# Altium PCB bottle.PcbDoc (part 2 of 3)
Units mil, origin at the board's own origin, x right, y up, seen from the top; angles counter-clockwise.
Board outline 2167.23 x 704.79 mil, 4 copper layers (Top Layer, GND, PWR, Bottom Layer), stack 23.756 mil thick; 195 components, 172 nets, 770 pads, 122 vias.
Unrouted connection lines stored in the file: 308.
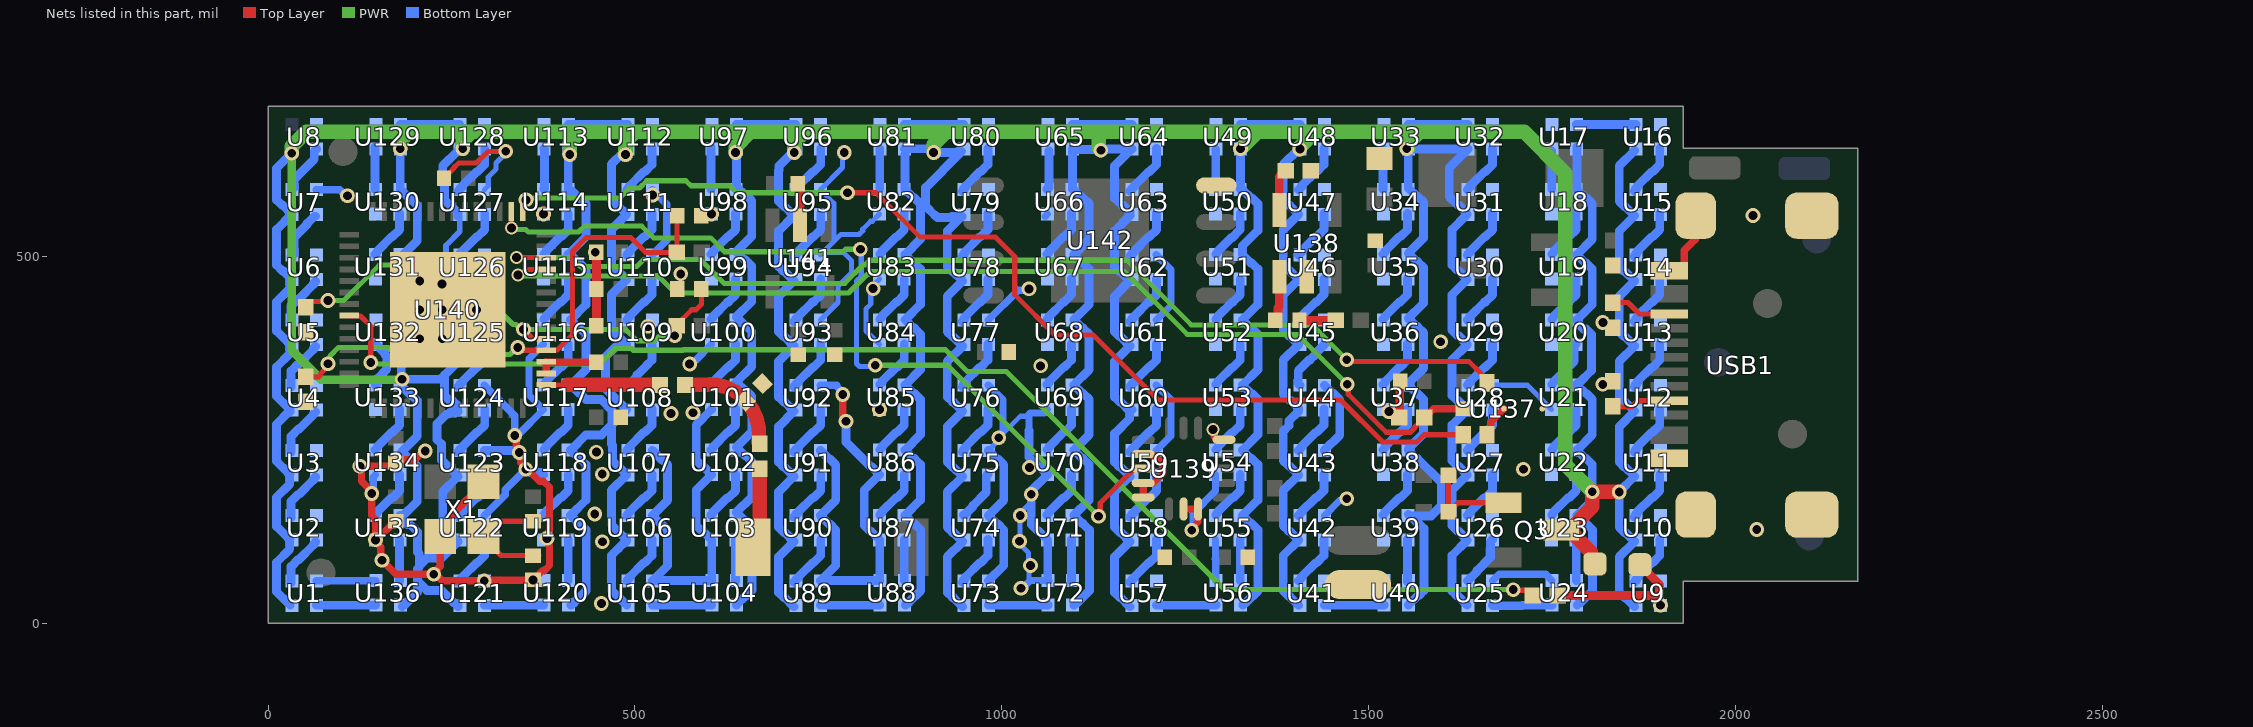
[diagram p4: the nets of this part, all layers, seen from the top]

## Via types
v1: diameter 20, hole 12, Top Layer to Bottom Layer, tented both sides, 96 vias
v2: diameter 18, hole 12, Top Layer to Bottom Layer, tented both sides, 13 vias
v3: diameter 24, hole 12, Top Layer to Bottom Layer, tented both sides, 13 vias

## Nets (pads, with @x,y where several pads share a name; then routed paths per layer and width w, separated by ;. In a path a pad name is that pad's centre, name@x,y a point inside that pad or via, vN(x,y) a via of type N, cw(c..) or ccw(c..) an arc to the next point about the centre after c; other vN are vias at no path point) (continued)
+5V_2812: pad.4@1808.82,81.04 Q3.3 U1.2 U2.2 U3.2 U4.2 U5.2 U6.2 U7.2 U8.2 U9.2 U10.2 U11.2 U12.2 U13.2 U14.2 U15.2 U16.2 U17.2 U18.2 U19.2 U20.2 U21.2 U22.2 U23.2 U24.2 U25.2 U26.2 U27.2 U28.2 U29.2 U30.2 U31.2 U32.2 U33.2 U34.2 U35.2 U36.2 U37.2 U38.2 U39.2 U40.2 U41.2 U42.2 U43.2 U44.2 U45.2 U46.2 U47.2 U48.2 U49.2 U50.2 U51.2 U52.2 U53.2 U54.2 U55.2 U56.2 U57.2 U58.2 U59.2 U60.2 U61.2 U62.2 U63.2 U64.2 U65.2 U66.2 U67.2 U68.2 U69.2 U70.2 U71.2 U72.2 U73.2 U74.2 U75.2 U76.2 U77.2 U78.2 U79.2 U80.2 U81.2 U82.2 U83.2 U84.2 U85.2 U86.2 U87.2 U88.2 U89.2 U90.2 U91.2 U92.2 U93.2 U94.2 U95.2 U96.2 U97.2 U98.2 U99.2 U100.2 U101.2 U102.2 U103.2 U104.2 U105.2 U106.2 U107.2 U108.2 U109.2 U110.2 U111.2 U112.2 U113.2 U114.2 U115.2 U116.2 U117.2 U118.2 U119.2 U120.2 U121.2 U122.2 U123.2 U124.2 U125.2 U126.2 U127.2 U128.2 U129.2 U130.2 U131.2 U132.2 U133.2 U134.2 U135.2 U136.2 | length 15956.2
  Top Layer w20: Q3.3@1762.58,127 Q3.3@1773.4,127 ; pad.4@1808.82,81.04 1803.07,86.79 1803.07,97.33 Q3.3@1773.4,127 ; v1(1841.88,179) 1841.49,179.4 v1(1805.2,179.4) 1805.2,158.79 Q3.3@1773.4,127
  PWR w12: v1(32.2,641) 32.2,372.25 72.46,332 181.89,332 v1(182.58,332.69)
  PWR w20: v1(32.2,641) 32.2,650.28 51.92,670 192.2,670 ; v1(180.13,646.93) 180.13,657.93 192.2,670 ; v1(265.2,646.98) 265.2,658 277.2,670 ; v1(411.2,639) 411.2,655.44 425.76,670 ; v1(487.2,639) 487.2,657 500.2,670 ; v1(637.2,642) 637.2,650 657.2,670 ; v1(717.2,642) 717.2,656 731.2,670 ; v1(907.2,642) 907.2,653 924.2,670 ; v1(1135.2,645) 1132.2,648 1132.2,670 ; v1(1325.42,646.93) 1326.13,646.93 1349.2,670 ; v1(1406.49,646.54) 1406.49,649.28 1427.2,670 ; v1(1552.24,647.02) 1554.48,649.26 1554.48,654.78 1569.7,670 ; v1(1805.2,179.4) 1768.41,216.19 1768.41,613.8 1712.2,670 1569.7,670 ; 192.2,670 277.2,670 ; 277.2,670 425.76,670 ; 425.76,670 500.2,670 ; 500.2,670 657.2,670 ; 657.2,670 731.2,670 ; 731.2,670 924.2,670 ; 924.2,670 1132.2,670 ; 1132.2,670 1349.2,670 ; 1349.2,670 1427.2,670 ; 1427.2,670 1569.7,670
  Bottom Layer w7.87: U126.2@261.2,468.84 256.28,473.76 256.28,475.46 242.4,489.33 242.4,515.28 261.2,534.08 261.2,552.77 258.74,555.23 U127.2@261.2,557.69
  Bottom Layer w12: U8.2@29.44,638.54 11.35,620.46 11.35,577.32 18.38,570.29 19.6,570.29 U7.2@32.21,557.69 11.35,536.83 11.35,488.48 19.64,480.18 20.86,480.18 30.07,470.98 29.35,470.26 29.35,456.37 11.35,438.37 11.35,398.71 27.21,382.85 29.35,382.85 30.07,382.13 29.35,381.41 29.35,367.52 11.35,349.52 11.35,309.87 27.21,294.01 29.35,294.01 30.07,293.28 30.07,289.01 29.35,288.29 28.06,288.29 11.35,271.58 11.35,221.02 27.21,205.16 29.35,205.16 30.07,204.44 29.35,203.72 29.35,189.83 11.35,171.83 11.35,132.17 27.21,116.31 29.35,116.31 30.07,115.59 29.35,114.87 29.35,100.98 11.35,82.98 11.35,43.33 27.21,27.46 29.35,27.46 30.07,26.74 U1.2@30.07,24.61 ; U135.2@179.74,147.31 182.6,144.45 182.6,141.73 189.63,134.7 193.57,134.7 203.59,124.68 203.59,97.31 205.97,94.93 205.97,78.37 ; U132.2@180.13,380.39 181.36,379.17 181.36,333.91 v1(182.58,332.69) 234.59,332.69 240.34,338.44 ; U130.2@180.13,591.94 v1(180.13,646.93) ; U135.2@182.34,145.31 203.2,166.17 203.2,214.52 194.9,222.82 193.68,222.82 182.34,234.16 203.2,255.02 203.2,303.37 194.9,311.66 193.68,311.66 U133.2@182.34,323.01 ; U131.2@182.34,500.7 203.2,521.56 203.2,569.91 194.91,578.2 193.68,578.2 U130.2@182.34,589.55 ; U136.2@182.73,23 185.59,25.86 186.81,25.86 203.59,42.64 203.59,57.89 ; U121.2@258.74,22.61 258.74,27.06 258.34,27.46 253.88,27.46 236.35,45 216.48,45 203.59,57.89 ; U125.2@258.74,371.14 258.74,356.84 240.34,338.44 ; U127.2@258.74,555.23 258.74,560.15 249.86,569.03 248.63,569.03 240.34,577.32 240.34,597.43 237.88,599.89 237.88,623.68 U128.2@258.74,644.54 ; U115.2@408.8,502.7 433.2,527.1 433.2,571.91 424.91,580.2 423.68,580.2 415.2,588.69 411.66,588.69 409.19,591.15 U113.2@409.19,639 ; U115.2@412.34,502.7 423.68,491.36 424.91,491.36 433.2,483.06 433.2,434.71 412.34,413.85 423.68,402.51 424.9,402.51 433.2,394.22 433.2,345.86 412.34,325.01 423.68,313.66 424.9,313.66 433.2,305.37 453.67,305.37 468.28,290.76 468.28,270.88 454.22,256.82 433,256.82 412.34,236.16 423.68,224.82 424.9,224.82 433.2,216.52 433.2,168.17 412.34,147.31 423.68,135.97 424.91,135.97 433.59,127.28 433.59,44.64 416.81,27.86 415.59,27.86 U120.2@412.73,25 ; U112.2@484.2,642 467.88,625.68 467.88,577.32 474.91,570.29 476.14,570.29 488.74,557.69 467.88,536.83 467.88,488.48 474.91,481.45 476.14,481.45 488.74,468.84 467.88,447.98 467.88,399.63 474.91,392.6 476.14,392.6 488.74,380 488.74,378.48 487.4,377.14 473.71,377.14 459.65,363.08 459.65,320.53 486.18,294.01 487.4,294.01 488.74,292.66 488.74,291.15 467.88,270.29 467.88,244.43 469.4,242.92 469.4,221.64 485.88,205.16 487.4,205.16 488.74,203.82 488.74,202.3 467.88,181.44 467.88,134.31 485.88,116.31 487.4,116.31 488.74,114.97 488.74,111.94 487.4,110.59 485.88,110.59 477.59,102.3 477.59,102.22 467.88,92.51 467.88,45.46 485.88,27.46 487.4,27.46 488.74,26.12 U105.2@488.74,24.61 ; U104.2@638.25,25 650.86,37.61 652.08,37.61 659.59,45.12 659.59,131.28 650.91,139.97 649.68,139.97 638.34,151.31 659.2,172.17 659.2,220.52 650.9,228.82 649.68,228.82 638.34,240.16 659.2,261.02 659.2,309.37 650.9,317.66 649.68,317.66 638.34,329.01 659.2,349.86 659.2,398.22 650.9,406.51 649.68,406.51 638.34,417.85 659.2,438.71 659.2,487.06 650.91,495.36 649.68,495.36 638.34,506.7 659.2,527.56 659.2,575.91 650.91,584.2 649.68,584.2 638.34,595.55 U97.2@638.34,644.07 ; U96.2@716.46,643.68 696.2,623.42 696.2,617.99 695.88,617.68 695.88,575.32 702.91,568.29 704.14,568.29 716.74,555.69 695.88,534.83 695.88,486.48 702.91,479.45 704.14,479.45 716.74,466.84 695.88,445.98 695.88,397.63 702.91,390.6 704.14,390.6 716.74,378 695.88,357.14 695.88,308.78 702.91,301.75 704.14,301.75 716.74,289.15 695.88,268.29 695.88,219.94 702.91,212.91 704.14,212.91 716.74,200.3 695.88,179.44 695.88,131.09 702.91,124.06 704.13,124.06 716.74,111.45 695.88,90.59 695.88,42.24 702.91,35.21 704.13,35.21 U89.2@716.74,22.61 ; U81.2@868.34,639.12 868.34,591.55 879.68,580.2 880.91,580.2 889.2,571.91 889.2,523.56 868.34,502.7 879.68,491.36 880.91,491.36 889.2,483.06 889.2,434.71 868.34,413.85 879.68,402.51 880.9,402.51 889.2,394.22 889.2,345.86 868.34,325.01 879.68,313.66 880.9,313.66 889.2,305.37 889.2,257.02 868.34,236.16 879.68,224.82 880.9,224.82 889.2,216.52 889.2,168.17 868.34,147.31 879.68,135.97 880.91,135.97 889.59,127.28 889.59,44.64 872.81,27.86 871.59,27.86 U88.2@868.73,25 ; U80.2@943.03,640.82 896.2,594 896.2,568.89 909.09,556 909.56,556 912.22,553.35 930.44,553.35 931.93,554.83 945.88,554.83 925.88,534.83 925.88,486.48 932.91,479.45 934.14,479.45 946.74,466.84 925.88,445.98 925.88,397.63 932.91,390.6 934.14,390.6 946.74,378 925.88,357.14 925.88,308.78 932.91,301.75 934.14,301.75 946.74,289.15 925.88,268.29 925.88,219.94 932.91,212.91 934.14,212.91 946.74,200.3 925.88,179.44 925.88,131.09 932.91,124.06 934.13,124.06 946.74,111.45 925.88,90.59 925.88,42.24 932.91,35.21 934.13,35.21 U73.2@946.74,22.61 ; U66.2@1096.36,591.94 U65.2@1096.36,646.93 ; U66.2@1098.34,591.55 1109.68,580.2 1110.91,580.2 1119.2,571.91 1119.2,523.56 1098.34,502.7 1109.68,491.36 1110.91,491.36 1119.2,483.06 1119.2,434.71 1098.34,413.85 1109.68,402.51 1110.9,402.51 1119.2,394.22 1119.2,345.86 1098.34,325.01 1109.68,313.66 1110.9,313.66 1119.2,305.37 1119.2,257.02 1098.34,236.16 1109.68,224.82 1110.9,224.82 1119.2,216.52 1119.2,168.17 1098.34,147.31 1109.68,135.97 1110.91,135.97 1119.59,127.28 1119.59,44.64 1102.81,27.86 1101.59,27.86 U72.2@1098.73,25 ; U57.2@1174.74,22.61 1162.13,35.21 1160.91,35.21 1153.88,42.24 1153.88,90.59 1174.74,111.45 1162.13,124.06 1160.91,124.06 1153.88,131.09 1153.88,179.44 1174.74,200.3 1162.14,212.91 1160.91,212.91 1153.88,219.94 1153.88,258.68 1174.57,279.37 1174.57,288.29 U60.2@1177.43,291.15 ; U60.2@1174.74,289.15 1162.14,301.75 1160.91,301.75 1153.88,308.78 1153.88,357.14 1174.74,378 1162.14,390.6 1160.91,390.6 1153.88,397.63 1153.88,445.98 1174.74,466.84 1162.14,479.45 1160.91,479.45 1153.88,486.48 1153.88,534.83 1174.74,555.69 1174.74,560.38 1164.82,570.29 1163.6,570.29 1153.88,580.01 1153.88,623.68 U64.2@1174.74,644.54 ; U50.2@1325.42,591.94 v1(1325.42,646.93) ; U51.2@1327.89,502.7 1327.89,512.14 1328.34,512.59 1328.34,514.75 1349.2,535.61 1349.2,571.91 1340.91,580.2 1339.68,580.2 U50.2@1328.34,591.55 ; U51.2@1328.34,502.7 1339.68,491.36 1340.91,491.36 1349.2,483.06 1349.2,434.71 1328.34,413.85 1339.68,402.51 1340.9,402.51 1349.2,394.22 1349.2,345.86 1328.34,325.01 1339.68,313.66 1340.9,313.66 1349.2,305.37 1349.2,257.02 1328.34,236.16 1339.68,224.82 1340.9,224.82 1349.2,216.52 1349.2,168.17 1328.34,147.31 1339.68,135.97 1340.91,135.97 1349.59,127.28 1349.59,44.64 1332.81,27.86 1331.59,27.86 U56.2@1328.73,25 ; U41.2@1404.74,24.61 1392.13,37.21 1390.91,37.21 1383.88,44.24 1383.88,92.59 1404.74,113.45 1392.13,126.06 1390.91,126.06 1383.88,133.09 1383.88,181.44 1404.74,202.3 1392.14,214.91 1390.91,214.91 1383.88,221.94 1383.88,262.09 1391.58,269.79 1391.58,276.24 1404.74,289.4 1404.74,292.89 1393.88,303.75 1392.66,303.75 1383.88,312.53 1383.88,359.14 1404.74,380 1392.14,392.6 1390.91,392.6 1383.88,399.63 1383.88,447.98 1404.74,468.84 1392.14,481.45 1390.91,481.45 1383.88,488.48 1383.88,536.83 1404.74,557.69 1392.14,570.29 1390.91,570.29 1383.88,577.32 1383.88,625.68 U48.2@1404.74,646.54 ; v1(1552.24,647.02) 1552.53,646.73 U33.2@1554.34,646.73 ; U39.2@1554.34,148.77 1556.94,146.17 1565.26,146.17 1585.14,146.17 1599.2,160.23 1599.2,192.27 1566.71,224.75 1565.49,224.75 1554.34,235.91 1554.34,238.16 1575.2,259.02 1575.2,305.12 1566.71,313.6 1565.49,313.6 1554.34,324.75 1554.34,327.01 1575.2,347.86 1575.2,396.22 1566.9,404.51 1565.68,404.51 1554.34,415.85 1575.2,436.71 1575.2,485.06 1566.91,493.36 1565.68,493.36 1554.34,504.7 1575.2,525.56 1575.2,573.91 1566.91,582.2 1565.68,582.2 1554.34,593.55 U33.2@1554.34,646.73 ; U40.2@1554.48,25 1567.09,37.61 1568.31,37.61 1575.59,44.89 1575.59,129.28 1566.91,137.97 1565.68,137.97 U39.2@1561.37,142.28 ; U25.2@1634.74,24.61 1622.13,37.21 1620.91,37.21 1613.88,44.24 1613.88,92.59 1634.74,113.45 1622.13,126.06 1620.91,126.06 1613.88,133.09 1613.88,181.44 1634.74,202.3 1622.14,214.91 1620.91,214.91 1613.88,221.94 1613.88,270.29 1634.74,291.15 1622.14,303.75 1620.91,303.75 1613.88,310.78 1613.88,359.14 1634.74,380 1622.14,392.6 1620.91,392.6 1613.88,399.63 1613.88,447.98 1634.74,468.84 1622.14,481.45 1620.91,481.45 1613.88,488.48 1613.88,536.83 U31.2@1632.69,555.63 ; U31.2@1634.74,557.69 U31.2@1632.69,555.63 ; U32.2@1634.74,645.73 1610.21,621.2 1610.21,581.8 1621.72,570.29 1622.94,570.29 1632.69,560.55 U31.2@1632.69,555.63 ; U32.2@1635.55,646.54 1635.35,646.73 U33.2@1554.34,646.73 ; U20.2@1783.14,413.85 1786,410.99 1786,408.27 1793.03,401.25 1796.97,401.25 1804,394.22 1804,344.67 1787.2,327.86 1786,327.86 1784.34,326.2 1784.34,325.01 1795.68,313.66 1796.9,313.66 1805.2,305.37 1805.2,257.02 1784.34,236.16 1795.68,224.82 1796.9,224.82 1805.2,216.52 v1(1805.2,179.4) 1805.2,168.17 1784.34,147.31 1795.68,135.97 1796.91,135.97 1805.59,127.28 1805.59,44.64 1788.81,27.86 1787.59,27.86 U24.2@1784.73,25 ; U20.2@1784.34,413.85 1805.2,434.71 1805.2,483.06 1796.91,491.36 1795.68,491.36 1784.34,502.7 1805.2,523.56 1805.2,571.91 1796.91,580.2 1795.68,580.2 1784.34,591.55 U17.2@1784.34,649.79 ; U9.2@1862.74,22.61 1850.13,35.21 1848.91,35.21 1841.88,42.24 1841.88,90.59 1862.74,111.45 1850.13,124.06 1848.91,124.06 1841.88,131.09 v1(1841.88,179) 1841.88,179.44 1862.74,200.3 1850.14,212.91 1848.91,212.91 1841.88,219.94 1841.88,268.29 1862.74,289.15 1850.14,301.75 1848.91,301.75 1841.88,308.78 1841.88,357.14 1862.74,378 1850.14,390.6 1848.91,390.6 1841.88,397.63 1841.88,445.98 1862.74,466.84 1850.14,479.45 1848.91,479.45 1841.88,486.48 1841.88,534.83 1862.74,555.69 1850.14,568.29 1848.91,568.29 1841.88,575.32 1841.88,623.68 U16.2@1862.74,644.54 ; 203.59,57.89 203.59,74.33 205.97,76.71 205.97,78.37 ; 205.97,78.37 216.6,89 236.29,89 258.74,111.45 246.13,124.06 244.91,124.06 237.88,131.09 237.88,179.44 258.74,200.3 236.2,222.84 236.2,244.48 230.2,250.48 230.2,272.11 243.09,285 245.59,285 248.88,288.29 258.34,288.29 258.74,288.69 258.74,289.15 258.34,289.55 258.34,296.72 251.31,303.75 247.37,303.75 240.34,310.78 240.34,338.44
  Bottom Layer w12.01: U81.2@867.31,646.93 v1@900.11,646.93 ; v1(907.2,642) 938.49,642 940.17,643.68 U80.2@945.52,643.68 ; U65.2@1096.36,646.93 1097.33,645.96 1134.24,645.96 v1(1135.2,645) 1137.37,645 1138.9,646.54 U64.2@1177.43,646.54
ANT: R6.1 U140.1 | length 155.2
  Top Layer w7: U140.1@378.97,325.07 408.22,325.07
  Top Layer w19.68: 408.22,325.07 R6.1@534.16,325.07
DIN: R10.1 U140.36 | length 1819.6
  Top Layer w7: U140.36@110.66,419.56 111.1,419.12 125.81,419.12 139.75,405.18 v1(139.75,355.53) ; v1@1696.58,45.12 v1(1697.46,46) 1698.33,45.13 1716.83,45.13 R10.1@1723.96,38
  PWR w7: v1@139.88,355.66 141.97,353.57 451.74,353.57 472.81,374.64 495.36,374.64 497.65,372.35 565.75,372.35 566.43,373.03 923.34,373.03 952.87,343.5 1006.28,343.5 1303.78,46 v1(1697.46,46)
EN: C12.2 R2.1 R19.2 U140.4 | length 727.7
  Top Layer w7: R19.2@51.2,336.08 69.28,336.08 71.33,338.13 71.33,340.25 81.57,350.48 v1(81.57,354) ; v1(340.2,376) 343.72,376 347.41,372.31 U140.4@378.97,372.31 ; U140.4@379.4,372.75 394.12,372.75 414.82,393.45 414.82,507.12 433.65,525.95 494.29,525.95 514.42,505.82 R2.1@556.93,505.82 557.43,506.32 C12.2@557.43,555.82
  PWR w7: v1(81.57,354) 81.57,357.52 84.2,360.15 84.2,364.59 95.62,376 164.2,376 173.64,366.57 329.6,366.57 339.04,376 v1(340.2,376)
GND: C1.1 C2.2 C3.1 C4.1 C5.2 C6.1 C7.1 C8.1 C9.1 C10.1 C11.1 C12.1 C17.1 C18.1 C19.1 C20.1 C21.1 C22.1 C23.1 L3.1 pad.2@1485.65,52.9 R5.1 R12.1 R13.2 R18.1 R19.1 R20.2 R22.1 U1.3 U2.3 U3.3 U4.3 U5.3 U6.3 U7.3 U8.3 U9.3 U10.3 U11.3 U12.3 U13.3 U14.3 U15.3 U16.3 U17.3 U18.3 U19.3 U20.3 U21.3 U22.3 U23.3 U24.3 U25.3 U26.3 U27.3 U28.3 U29.3 U30.3 U31.3 U32.3 U33.3 U34.3 U35.3 U36.3 U37.3 U38.3 U39.3 U40.3 U41.3 U42.3 U43.3 U44.3 U45.3 U46.3 U47.3 U48.3 U49.3 U50.3 U51.3 U52.3 U53.3 U54.3 U55.3 U56.3 U57.3 U58.3 U59.3 U60.3 U61.3 U62.3 U63.3 U64.3 U65.3 U66.3 U67.3 U68.3 U69.3 U70.3 U71.3 U72.3 U73.3 U74.3 U75.3 U76.3 U77.3 U78.3 U79.3 U80.3 U81.3 U82.3 U83.3 U84.3 U85.3 U86.3 U87.3 U88.3 U89.3 U90.3 U91.3 U92.3 U93.3 U94.3 U95.3 U96.3 U97.3 U98.3 U99.3 U100.3 U101.3 U102.3 U103.3 U104.3 U105.3 U106.3 U107.3 U108.3 U109.3 U110.3 U111.3 U112.3 U113.3 U114.3 U115.3 U116.3 U117.3 U118.3 U119.3 U120.3 U121.3 U122.3 U123.3 U124.3 U125.3 U126.3 U127.3 U128.3 U129.3 U130.3 U131.3 U132.3 U133.3 U134.3 U135.3 U136.3 U137.3 U137.4 U138.2 U139.5 U139.10 U139.12 U139.13 U139.15 U139.16 U140.57 U141.2 U142.4 USB1.1 USB1.2 USB1.3 USB1.4 USB1.A1 USB1.A12 USB1.B1 USB1.B12 X1.2 X1.4 | length 5599.1
  Top Layer w7: C18.1@239.66,607 239.66,607.79 246.01,614.13 246.75,614.13 253.4,620.78 253.4,621.57 258.97,627.13 259.75,627.13 260.1,627.48 283.8,627.48 299.76,643.45 323.47,643.45 v1(323.76,643.74)
  Top Layer w10: C1.1@173.97,139.28 173.18,139.28 147.75,113.85 v1(146.28,113.85) ; v1(214.2,234.91) 211.5,234.91 199.6,223.01 177.7,223.01 C17.1@173.97,219.28 169.13,214.44 150.64,214.44 150.2,214 v1(125.2,214) 127.12,212.09 127.12,193.79 141.2,179.71 v1(141.2,177) 141.2,147 146.28,141.93 v1(146.28,113.85) ; X1.2@293.49,193.22 293.49,191.26 251.09,148.86 251.09,135.07 X1.4@234.44,118.41 234.44,77.86 225.71,69.13 v1(225.71,67) ; v1(336.2,256) 338.12,254.09 338.12,239.79 342.2,235.71 v1(342.2,233) 344.12,231.09 344.12,219.79 351.2,212.71 v1(351.2,210) 353.91,210 369.97,193.94 375.41,193.94 383.47,185.89 383.47,125.75 381.91,124.19 381.91,117.73 v1(380,115.82) 381.91,113.9 381.91,107.44 383.47,105.89 383.47,78.83 376.16,71.52 373.99,71.52 361.76,59.28 v1(360.97,59.28) 360.37,58.67 295.27,58.67 v1(294.66,58.07) 237.35,58.07 228.42,67 v1(225.71,67) ; v1(783.42,312) 783.42,282.62 787.82,278.22 v1(787.82,275.52) ; U139.13@1192.9,171.6 U139.12@1192.9,191.3 1193.09,191.49 1206.98,191.49 1219.65,204.17 1219.65,217.83 1208.98,228.5 1205.62,228.5 1203.42,230.7 U139.10@1192.9,230.7 ; U139.15@1248,155.9 U139.16@1267.7,155.9 1267.51,155.71 1267.51,138.21 1259,129.71 v1(1259,127) ; v2(1288.2,264.15) 1289.73,262.62 1289.73,254.67 1292.66,251.74 1292.66,250.76 1293.12,250.3 U139.5@1303.1,250.3 ; U137.4@1661.57,257.13 1666.81,262.37 1666.81,274.7 U137.3@1684.68,292.57 ; USB1.A12@1909.8,486.78 1929.49,486.78 1930.4,487.69 1930.4,508.52 1944.87,523 1945.83,523 ; v1(146.28,113.85) 146.28,111.14 153.29,104.13 153.29,87.91 v1(155.2,86) 174.2,67 v1(225.71,67)
  Top Layer w12: v1(445.88,506) 445.88,505.36 447.43,503.82 C8.1@447.43,455.82 C9.1@447.43,405.82 ; C19.1@721.69,603.47 725.15,600.01 U141.2@725.15,542.89 ; R20.2@1542.16,280.6 1542.68,281.12 1542.68,329.48 C22.1@1543.2,330
  Bottom Layer w7: v3(284.17,427.43) 284.4,427.43 313.02,456.05 313.02,483.95 U126.3@294.66,502.31 ; U127.3@294.66,591.15 300.02,596.51 300.02,608.51 310.7,619.2 310.7,627.51 323.76,640.56 v1(323.76,643.74) ; U93.3@752.78,413.46 776.79,437.47 776.79,459.55 795.44,478.2 795.44,494.36 784.02,505.78 U94.3@756.25,505.78 ; U94.3@752.78,502.31 U94.3@756.25,505.78 ; v1(785.2,642) 783.13,639.92 783.13,621.5 U95.3@752.78,591.15 771.14,572.79 771.14,520.66 ; v1(824.7,456.34) 822.21,453.85 822.21,448.19 821.51,447.49 821.51,435.19 815.09,428.77 815.09,398.75 U84.3@833.45,380.39 ; v1@826.49,456.34 826.49,459.51 828.09,461.11 828.09,463.88 U83.3@833.45,469.23 ; U82.3@833.45,558.08 823.49,548.12 821.47,548.12 810.63,537.28 810.63,535.27 805.56,530.19 780.67,530.19 771.14,520.66 ; U75.3@981.84,235.77 995.93,249.86 v1(995.93,252.92) 1025.42,282.41 1034.72,282.41 ; 1036.42,161.73 1025.2,150.52 v1(1025.2,147) 1024.7,146.5 1024.7,112.5 v1(1024.2,112) 1024.2,108.48 1036.72,95.97 1036.72,81.49 v1(1039.2,79) 1037.2,77 1037.2,59.8 ; U28.3@1669.01,324.61 1716.61,324.61 U21.3@1749.68,291.54 ; U94.3@756.25,505.78 771.14,520.66
  Bottom Layer w10: U1.3@65.67,58.07 65.87,58.27 146.47,58.27 U136.3@146.67,58.47 ; U7.3@65.67,591.15 97.35,591.15 105.5,583 v1(108.2,583) ; v1(141.2,177) 143.12,178.91 143.12,199.53 U134.3@146.28,202.69 ; U122.3@294.66,146.92 323.23,175.48 323.23,182.03 v1(351.2,210) ; U124.3@294.66,324.61 336.2,283.07 v1(336.2,256) 338.12,257.91 341.71,257.91 U117.3@375.33,291.54 355.48,311.4 355.48,360.53 U116.3@375.33,380.39 ; U110.3@523.72,502.31 543.58,522.16 543.58,571.29 U111.3@527.5,587.37 ; U111.3@523.72,591.15 U111.3@527.5,587.37 ; v1(524.1,583.97) U111.3@527.5,587.37 ; v1(574.5,353.53) 577.21,353.53 582.59,358.91 582.92,358.91 U100.3@604.39,380.39 ; U92.3@752.78,324.61 775.28,324.61 775.28,322.85 783.42,314.71 v1(783.42,312) ; U76.3@981.84,324.61 1001.69,304.75 1001.69,261.39 995.93,255.62 v1(995.93,252.92) ; U77.3@981.84,413.46 1022.46,454.09 1035.29,454.09 v1(1037.2,456) ; v1(1026.37,47.8) 1028.38,47.8 1039.04,58.47 U72.3@1062.9,58.47 ; 1037.2,263.09 1037.2,284.9 1039.12,286.81 1057.78,286.81 U69.3@1062.51,291.54 ; U66.3@1059.16,554.74 U66.3@1062.51,558.08 ; U59.3@1210.89,235.77 1230.75,255.62 1230.75,304.75 U60.3@1210.89,324.61 ; U61.3@1210.89,413.46 1230.75,433.32 1230.75,482.45 U62.3@1210.89,502.31 ; v1(1259,127) 1260.91,128.91 1260.91,149.93 1291.56,180.58 U54.3@1291.56,202.69 ; U55.3@1291.56,113.85 1291.38,113.67 1291.38,88.18 1291.2,88 1291.58,87.62 1291.58,58.84 U56.3@1291.96,58.47 ; U42.3@1439.95,146.92 1461.12,168.09 1468.45,168.09 v1(1470.36,170) ; U25.3@1669.01,58.07 1677.94,67 1741.54,67 U24.3@1750.07,58.47
  Bottom Layer w12: U123.3@294.66,235.77 337.27,235.77 340.04,233 v1(342.2,233) ; v1@357.82,205.55 372.48,205.55 U118.3@375.33,202.69 ; U105.3@523.72,58.07 U105.3@523.92,58.27 ; U107.3@523.72,235.77 536.33,223.16 537.55,223.16 544.58,216.13 544.58,167.78 U106.3@523.72,146.92 536.33,134.31 537.55,134.31 544.58,127.28 544.58,78.93 U105.3@523.92,58.27 ; U101.3@604.39,291.54 583.53,270.68 583.53,222.33 591.83,214.04 593.05,214.04 U102.3@604.39,202.69 583.53,181.84 583.53,133.48 591.82,125.19 593.05,125.19 604.59,113.65 604.59,58.66 U104.3@604.79,58.47 604.59,58.27 U105.3@523.92,58.27 ; U89.3@752.78,58.07 U89.3@752.98,58.27 ; U91.3@752.78,235.77 764.12,224.42 765.35,224.42 773.64,216.13 773.64,167.78 U90.3@752.78,146.92 764.12,135.58 765.34,135.58 773.64,127.28 773.64,78.93 U89.3@752.98,58.27 ; v1(787.82,275.52) 787.82,247.1 820.88,214.04 822.11,214.04 U86.3@833.45,202.69 812.59,181.84 812.59,133.48 820.88,125.19 822.11,125.19 833.65,113.65 833.65,58.66 U88.3@833.84,58.47 833.65,58.27 U89.3@752.98,58.27 ; U73.3@981.84,58.07 1002.7,78.93 1002.7,127.28 994.4,135.58 993.18,135.58 U74.3@981.84,146.92 1002.7,167.78 1002.7,216.13 994.4,224.42 993.18,224.42 U75.3@981.84,235.77 ; 1037.2,263.09 1037.2,226.77 1049.94,214.04 ; 1051.16,214.04 U70.3@1062.51,202.69 1059.65,199.84 1041.74,181.92 1041.74,177.53 v1(1040.2,176) 1040.2,134.93 1049.22,125.91 1050.44,125.91 1059.65,116.71 1062.7,113.65 1062.7,58.66 U72.3@1062.9,58.47 ; U43.3@1439.95,235.77 1460.81,256.62 1460.81,304.98 1452.52,313.27 1451.29,313.27 U44.3@1439.95,324.61
  other v1: 454.2,27 455.59,111.33 2029.2,128 445.2,149 455.4,203.43 1711.2,210 1037.81,212.6 447.4,233.43 549.2,286 579.2,287 1528.03,288.65 833.45,291.54 1819.36,325.8 1053,351 1598.39,384.01 517.82,404.85 1819.57,410.11 562.43,476.45 2024.2,556 375.33,558.08 604.39,558.08
  other v3: 206.62,388.07 237.33,388.07 206.62,427.44 237.33,427.44 236.91,462.46 206.62,466.81
GYRO_INT: U139.11 U140.16 | length 1180.4
  Top Layer w7: U140.16@331.43,548.5 331.43,539.19 v2(331.65,538.97) ; v1(1131.88,146.1) 1134.37,148.59 1134.37,164.23 1176.44,206.3 1176.87,206.3 1181.57,211 U139.11@1192.9,211
  PWR w7: v2(331.65,538.97) 333.62,537 351.15,537 354.65,533.5 423.18,533.5 431.18,541.5 509.23,541.5 525.15,525.58 603.2,525.58 622.23,506.55 783.33,506.55 786.83,510.05 v1(807.33,510.05) ; v1(827.68,351.89) 926.1,351.89 v1(1131.88,146.1)
  Bottom Layer w7: v1(807.33,510.05) 808.44,508.93 808.44,472.82 802.2,466.58 802.2,434.27 802.09,434.15 802.09,393.55 802.2,393.44 802.2,354.1 806.31,350 825.79,350 v1(827.68,351.89)
IO0: C11.2 R1.1 R18.2 U140.5 | length 693.8
  Top Layer w7: R18.2@51.2,431.04 51.2,431.55 58.33,438.67 80.18,438.67 v1(81.59,440.08) ; v1(348.09,400.78) 348.09,400.63 360.23,388.5 378.53,388.5 U140.5@378.97,388.06 ; v1(554.2,392.03) 554.2,402.59 564.56,412.95 564.56,414.57 577.53,427.54 583.35,427.54 590.51,434.69 C11.2@590.51,455.82
  PWR w7: v1(81.59,440.08) 103.1,440.08 151.33,488.31 258.13,488.31 307.59,438.85 307.59,433.62 333.66,407.55 337.79,407.55 344.29,401.06 v1@348.09,401.06 ; v1(348.09,400.78) 487.61,400.78 503.03,385.35 526.87,385.35 533.55,392.03 v1(554.2,392.03)
MIC_SCK: U137.2 U140.12 | length 1471.1
  Top Layer w7: v2(338.55,498.97) 338.88,498.64 378.63,498.64 U140.12@378.97,498.3 ; v1(1470.36,359.5) 1472.64,357.23 1636.82,357.23 1654.84,339.21 1654.84,334.74 U137.2@1661.57,328
  PWR w7: v2(338.55,498.97) 413.35,498.97 425.82,486.5 502.56,486.5 512.01,495.95 588.89,495.95 621.31,463.53 785.93,463.53 810.82,488.42 813.24,488.42 819.82,495 1170.39,495 1258.39,407 1422.86,407 v1(1470.36,359.5)
MIC_SD: R20.1 U137.6 U140.11 | length 1464.2
  Top Layer w7: v2(340.64,475.06) 343.61,475.06 351.1,482.55 U140.11@378.97,482.55 ; v1(1471,325.9) 1472.43,324.46 1472.43,312.35 1524.32,260.47 1557.23,260.47 1562.8,266.03 1562.8,267.15 1568.61,272.96 1568.61,273.47 1575.74,280.6 R20.1@1576.24,280.6
  Top Layer w10: R20.1@1576.24,280.6 1576.75,280.6 1588.72,292.57 U137.6@1629.2,292.57
  PWR w7: v2(340.64,475.06) 342.2,473.5 531.9,473.5 554.87,450.53 791.31,450.53 816.2,475.42 818.63,475.42 822.65,479.45 1167.56,479.45 1253.01,394 1402.9,394 v1(1471,325.9)
MIC_WS: U137.5 U140.15 | length 1488.3
  Top Layer w7: U140.15@347.17,561.59 347.17,570.74 351.39,574.97 v1(351.39,577.35) ; v1(789.73,587.1) 828.23,587.1 888.85,526.48 991.52,526.48 1017.7,500.3 1017.7,447.92 1072.5,393.13 1124.87,393.13 1213.5,304.5 1461.9,304.5 1518.93,247.47 1565.87,247.47 1575.53,257.13 U137.5@1629.2,257.13
  PWR w7: v1(351.39,577.35) 353.86,579.81 478.91,579.81 492.6,593.5 506.05,593.5 516.02,603.47 569.28,603.47 576.25,596.5 629.5,596.5 638.9,587.1 v1(789.73,587.1)
NetAE1_1: AE1.1 R17.2 | length 94
  Top Layer w19.68: AE1.1@669.97,109 R17.2@669.97,203.04
NetC2_1: C2.1 L4.2 X1.1 | length 172.7
  Top Layer w7: C2.1@368.97,92.36 317.58,92.36 293.49,116.45 X1.1@293.49,118.41 293.49,120.38 312.39,139.28 L4.2@368.97,139.28
NetL2_2: L2.2 U140.2 U140.3 | length 84.5
  Top Layer w10: U140.2@378.97,340.82 U140.3@378.97,356.57 379.34,356.19 447.05,356.19 L2.2@447.43,355.82
NetL3_2: L3.2 R6.2 R17.1 | length 153.7
  Top Layer w19.68: R6.2@576.25,325.01 604.39,325.01 ; 592.74,325.61 cw(c600.87,257.87) R17.1@668.33,247.68
NetLED1_1: LED1.1 R21.1 | length 49.2
  Top Layer w12: LED1.1@1405.97,413 R21.1@1455.14,413.02
NetLED1_2: LED1.2 U138.1 | length 61.9
  Top Layer w12: LED1.2@1372.89,413 1376.73,416.84 1376.73,430.05 1378.49,431.8 U138.1@1378.49,472.58
NetQ3_1: Q3.1 R11.1 R16.2 | length 129.8
  Top Layer w7: R11.1@1609.2,202 R16.2@1609.2,152 1609.71,152 1622.11,164.4 Q3.1@1683.83,164.4
NetR10_2: pad.4@1870.2,80 R10.2 U9.4 | length 210.3
  Top Layer w11.81: pad.4@1870.2,80 1896.5,53.7 1896.5,26.17 v1(1898.07,24.61)
  Top Layer w12: R10.2@1758.04,38 1884.67,38 v1@1896.5,26.17
NetR12_2: R12.2 USB1.A5 | length 85.2
  Top Layer w7: R12.2@1828.2,295.04 1858.39,295.04 1867.06,303.71 USB1.A5@1909.8,303.71
NetR13_1: R13.1 USB1.B5 | length 91.5
  Top Layer w7: R13.1@1828.2,445.04 1828.2,444.54 1835.33,437.41 1853.73,437.41 1869.32,421.82 USB1.B5@1909.8,421.82
NetR22_2: R22.2 U138.5 | length 57.5
  Top Layer w12: U138.5@1378.49,563.42 1378.49,608.83 1386.66,617 R22.2@1387.16,617
NetU1_1: U1.1 U2.4 | length 70
  Bottom Layer w12: U1.1@31.2,55.46 31.2,77.38 41.02,87.2 42.25,87.2 61.81,106.77 61.81,107.99 U2.4@64.67,110.85
NetU1_4: U1.4 U136.1 | length 81.2
  Bottom Layer w12: U1.4@65.67,24.61 65.87,24.8 146.47,24.8 U136.1@146.67,25
NetU2_1: U2.1 U3.4 | length 70
  Bottom Layer w12: U2.1@31.2,144.31 31.2,166.23 41.02,176.05 42.25,176.05 61.81,195.61 61.81,196.84 U3.4@64.67,199.69
NetU3_1: U3.1 U4.4 | length 70
  Bottom Layer w12: U3.1@31.2,233.16 31.2,255.08 41.02,264.89 42.25,264.89 61.81,284.46 61.81,285.68 U4.4@64.67,288.54
NetU4_1: U4.1 U5.4 | length 70
  Bottom Layer w12: U4.1@31.2,322 31.2,343.92 41.02,353.74 42.25,353.74 61.81,373.31 61.81,374.53 U5.4@64.67,377.39
NetU5_1: U5.1 U6.4 | length 70
  Bottom Layer w12: U5.1@31.2,410.85 31.2,432.77 41.02,442.59 42.25,442.59 61.81,462.15 61.81,463.38 U6.4@64.67,466.23
NetU6_1: U6.1 U7.4 | length 70.2
  Bottom Layer w12: U6.1@31.2,499.7 35.07,503.56 35.07,525.86 53.07,543.86 53.07,545.08 63.07,555.08 U7.4@64.67,555.08
NetU7_1: U7.1 U8.4 | length 69.2
  Bottom Layer w12: U7.1@32.21,591.15 35.07,594.01 35.07,604.86 62.82,632.61 62.82,643.68 U8.4@65.67,646.54
NetU9_1: U9.1 U10.4 | length 75.2
  Bottom Layer w12: U9.1@1862.74,56.07 1865.6,58.93 U9.1@1865.6,60.15 ; U9.1@1863.74,59.07 1866.6,61.93 1866.6,63.15 1886.16,82.72 1887.39,82.72 1897.2,92.54 U10.4@1897.2,114.45
NetU10_1: U10.1 U11.4 | length 75.5
  Bottom Layer w12: U10.1@1862.74,144.92 1865.6,147.78 U10.1@1865.6,149 ; U10.1@1863.74,147.92 1866.6,150.78 1866.6,152 1885.97,171.37 1887.58,171.37 1897.2,181 U11.4@1897.2,203.3
NetU11_1: U11.1 U12.4 | length 75.2
  Bottom Layer w12: U11.1@1862.74,233.77 1865.6,236.62 U11.1@1865.6,237.85 ; U11.1@1863.74,236.77 1866.6,239.62 1866.6,240.85 1886.16,260.41 1887.39,260.41 1897.2,270.23 U12.4@1897.2,292.15
NetU12_1: U12.1 U13.4 | length 75.2
  Bottom Layer w12: U12.1@1862.74,322.61 1865.6,325.47 U12.1@1865.6,326.69 ; U12.1@1863.74,325.61 1866.6,328.47 1866.6,329.69 1886.16,349.26 1887.39,349.26 1897.2,359.08 U13.4@1897.2,381
NetU13_1: U13.1 U14.4 | length 75.2
  Bottom Layer w12: U13.1@1862.74,411.46 1865.6,414.32 U13.1@1865.6,415.54 ; U13.1@1863.74,414.46 1866.6,417.32 1866.6,418.54 1886.16,438.11 1887.39,438.11 1897.2,447.92 U14.4@1897.2,469.84
NetU14_1: U14.1 U15.4 | length 75.2
  Bottom Layer w12: U14.1@1862.74,500.31 1865.6,503.16 U14.1@1865.6,504.39 ; U14.1@1863.74,503.31 1866.6,506.16 1866.6,507.39 1886.16,526.95 1887.39,526.95 1897.2,536.77 U15.4@1897.2,558.69
NetU15_1: U15.1 U16.4 | length 75.2
  Bottom Layer w12: U15.1@1862.74,589.15 1865.6,592.01 U15.1@1865.6,593.23 ; U15.1@1863.74,592.15 1866.6,595.01 1866.6,596.23 1886.16,615.8 1887.39,615.8 1897.2,625.62 U16.4@1897.2,647.54
NetU16_1: U16.1 U17.4 | length 81.2
  Bottom Layer w12: U17.4@1783.54,680.39 1783.73,680.2 1864.41,680.2 U16.1@1864.6,680
NetU17_1: U17.1 U18.4 | length 51.9
  Bottom Layer w12: U18.4@1749.74,592.15 U17.1@1749.74,644.07
NetU18_1: U18.1 U19.4 | length 70
  Bottom Layer w12: U19.4@1749.74,503.31 1752.6,506.16 1752.6,507.39 1772.16,526.95 1773.39,526.95 1783.2,536.77 U18.1@1783.2,558.69
NetU19_1: U19.1 U20.4 | length 70
  Bottom Layer w12: U20.4@1749.74,414.46 1752.6,417.32 1752.6,418.54 1772.16,438.11 1773.39,438.11 1783.2,447.92 U19.1@1783.2,469.84
NetU20_1: U20.1 U21.4 | length 69.2
  Bottom Layer w12: U21.4@1749.74,325.61 1752.6,328.47 1752.6,329.69 1780.28,357.38 1780.28,378.07 U20.1@1783.2,381
NetU21_1: U21.1 U22.4 | length 70
  Bottom Layer w12: U22.4@1749.74,236.77 1752.6,239.62 1752.6,240.85 1772.16,260.41 1773.39,260.41 1783.2,270.23 U21.1@1783.2,292.15
NetU22_1: U22.1 U23.4 | length 70.2
  Bottom Layer w12: U23.4@1749.74,147.92 1752.6,150.78 1752.6,152 1771.97,171.37 1773.58,171.37 1783.2,181 U22.1@1783.2,203.3
NetU23_1: U23.1 U24.4 | length 56.3
  Bottom Layer w12: U24.4@1783.2,58.13 U23.1@1783.2,114.45
NetU24_1: U24.1 U25.4 | length 81.7
  Bottom Layer w12: U25.4@1669.01,24.61 1669.61,24 1709.14,24 1709.94,24.8 1747.21,24.8 1747.41,25 U24.1@1750.07,25
NetU25_1: U25.1 U26.4 | length 71.1
  Bottom Layer w12: U25.1@1634.74,58.07 U25.1@1635.54,58.07 1648.15,70.68 1648.15,71.9 1666.15,89.9 1666.15,111.4 U26.4@1669.2,114.45
NetU26_1: U26.1 U27.4 | length 75.5
  Bottom Layer w12: U26.1@1634.74,146.92 1637.6,149.78 U26.1@1637.6,151 ; U26.1@1635.74,147.92 1638.6,150.78 1638.6,152 1657.97,171.37 1659.58,171.37 1669.2,181 U27.4@1669.2,203.3
NetU27_1: U27.1 U28.4 | length 75.2
  Bottom Layer w12: U27.1@1634.74,235.77 1637.6,238.62 U27.1@1637.6,239.85 ; U27.1@1635.74,236.77 1638.6,239.62 1638.6,240.85 1658.16,260.41 1659.39,260.41 1669.2,270.23 U28.4@1669.2,292.15
NetU28_1: U28.1 U29.4 | length 75.2
  Bottom Layer w12: U28.1@1634.74,324.61 1637.6,327.47 U28.1@1637.6,328.69 ; U28.1@1635.74,325.61 1638.6,328.47 1638.6,329.69 1658.16,349.26 1659.39,349.26 1669.2,359.08 U29.4@1669.2,381
NetU29_1: U29.1 U30.4 | length 75.2
  Bottom Layer w12: U29.1@1634.74,413.46 1637.6,416.32 U29.1@1637.6,417.54 ; U29.1@1635.74,414.46 1638.6,417.32 1638.6,418.54 1658.16,438.11 1659.39,438.11 1669.2,447.92 U30.4@1669.2,469.84
NetU30_1: U30.1 U31.4 | length 75.2
  Bottom Layer w12: U30.1@1634.74,502.31 1637.6,505.16 U30.1@1637.6,506.39 ; U30.1@1635.74,503.31 1638.6,506.16 1638.6,507.39 1658.16,526.95 1659.39,526.95 1669.2,536.77 U31.4@1669.2,558.69
NetU31_1: U31.1 U32.4 | length 75.2
  Bottom Layer w12: U31.1@1634.74,591.15 1637.6,594.01 U31.1@1637.6,595.23 ; U31.1@1635.74,592.15 1638.6,595.01 1638.6,596.23 1658.16,615.8 1659.39,615.8 1669.2,625.62 U32.4@1669.2,647.54
NetU32_1: U32.1 U33.4 | length 81.2
  Bottom Layer w12: U33.4@1554.48,680.39 1554.68,680.2 1635.35,680.2 U32.1@1635.55,680
NetU33_1: U33.1 U34.4 | length 54.4
  Bottom Layer w12: U34.4@1519.74,592.15 U33.1@1519.74,646.54
NetU34_1: U34.1 U35.4 | length 70
  Bottom Layer w12: U35.4@1519.74,503.31 1522.6,506.16 1522.6,507.39 1542.16,526.95 1543.39,526.95 1553.2,536.77 U34.1@1553.2,558.69
NetU35_1: U35.1 U36.4 | length 70
  Bottom Layer w12: U36.4@1519.74,414.46 1522.6,417.32 1522.6,418.54 1542.16,438.11 1543.39,438.11 1553.2,447.92 U35.1@1553.2,469.84
NetU36_1: U36.1 U37.4 | length 70
  Bottom Layer w12: U37.4@1519.74,325.61 1522.6,328.47 1522.6,329.69 1542.16,349.26 1543.39,349.26 1553.2,359.08 U36.1@1553.2,381
NetU37_1: U37.1 U38.4 | length 70
  Bottom Layer w12: U38.4@1519.74,236.77 1522.6,239.62 1522.6,240.85 1542.16,260.41 1543.39,260.41 1553.2,270.23 U37.1@1553.2,292.15
NetU38_1: U38.1 U39.4 | length 70.2
  Bottom Layer w12: U39.4@1519.74,147.92 1522.6,150.78 1522.6,152 1541.97,171.37 1543.58,171.37 1553.2,181 U38.1@1553.2,203.3
NetU39_1: U39.1 U40.4 | length 57.3
  Bottom Layer w12: U40.4@1553.2,57.19 U39.1@1553.2,114.45
NetU40_1: U40.1 U41.4 | length 81.2
  Bottom Layer w12: U41.4@1439.95,24.61 1440.15,24.8 1520.82,24.8 U40.1@1521.02,25
NetU41_1: U41.1 U42.4 | length 75.2
  Bottom Layer w12: U41.1@1404.74,58.07 1407.6,60.93 U41.1@1407.6,62.15 ; U41.1@1405.74,59.07 1408.6,61.93 1408.6,63.15 1428.16,82.72 1429.39,82.72 1439.2,92.54 U42.4@1439.2,114.45
NetU42_1: U42.1 U43.4 | length 75.5
  Bottom Layer w12: U42.1@1404.74,146.92 1407.6,149.78 U42.1@1407.6,151 ; U42.1@1405.74,147.92 1408.6,150.78 1408.6,152 1427.97,171.37 1429.58,171.37 1439.2,181 U43.4@1439.2,203.3
NetU43_1: U43.1 U44.4 | length 75.2
  Bottom Layer w12: U43.1@1404.74,235.77 1407.6,238.62 U43.1@1407.6,239.85 ; U43.1@1405.74,236.77 1408.6,239.62 1408.6,240.85 1428.16,260.41 1429.39,260.41 1439.2,270.23 U44.4@1439.2,292.15
NetU44_1: U44.1 U45.4 | length 71.7
  Bottom Layer w12: U44.1@1406.49,324.61 1404.4,326.7 1404.4,344.44 1419.09,359.14 1420.32,359.14 1427.35,366.17 1427.35,367.39 U45.4@1439.95,379.99
NetU45_1: U45.1 U46.4 | length 75.2
  Bottom Layer w12: U45.1@1404.74,413.46 1407.6,416.32 U45.1@1407.6,417.54 ; U45.1@1405.74,414.46 1408.6,417.32 1408.6,418.54 1428.16,438.11 1429.39,438.11 1439.2,447.92 U46.4@1439.2,469.84
NetU46_1: U46.1 U47.4 | length 75.2
  Bottom Layer w12: U46.1@1404.74,502.31 1407.6,505.16 U46.1@1407.6,506.39 ; U46.1@1405.74,503.31 1408.6,506.16 1408.6,507.39 1428.16,526.95 1429.39,526.95 1439.2,536.77 U47.4@1439.2,558.69
NetU47_1: U47.1 U48.4 | length 75.2
  Bottom Layer w12: U47.1@1404.74,591.15 1407.6,594.01 U47.1@1407.6,595.23 ; U47.1@1405.74,592.15 1408.6,595.01 1408.6,596.23 1428.16,615.8 1429.39,615.8 1439.2,625.62 U48.4@1439.2,647.54
NetU48_1: U48.1 U49.4 | length 81.2
  Bottom Layer w12: U49.4@1325.42,680.39 1325.62,680.2 1406.29,680.2 U48.1@1406.49,680
NetU49_1: U49.1 U50.4 | length 53.8
  Bottom Layer w12: U50.4@1291.74,592.15 U49.1@1291.74,645.98
NetU50_1: U50.1 U51.4 | length 69.8
  Bottom Layer w12: U51.4@1291.74,503.31 1294.6,506.16 1294.6,507.39 1312.44,525.22 1313.36,525.22 1325.2,537.07 U50.1@1325.2,558.69
NetU51_1: U51.1 U52.4 | length 70
  Bottom Layer w12: U52.4@1291.74,414.46 1294.6,417.32 1294.6,418.54 1314.16,438.11 1315.39,438.11 1325.2,447.92 U51.1@1325.2,469.84
NetU52_1: U52.1 U53.4 | length 70
  Bottom Layer w12: U53.4@1291.74,325.61 1294.6,328.47 1294.6,329.69 1314.16,349.26 1315.39,349.26 1325.2,359.08 U52.1@1325.2,381
NetU53_1: U53.1 U54.4 | length 70
  Bottom Layer w12: U54.4@1291.74,236.77 1294.6,239.62 1294.6,240.85 1314.16,260.41 1315.39,260.41 1325.2,270.23 U53.1@1325.2,292.15
NetU54_1: U54.1 U55.4 | length 70.2
  Bottom Layer w12: U55.4@1291.74,147.92 1294.6,150.78 1294.6,152 1313.97,171.37 1315.58,171.37 1325.2,181 U54.1@1325.2,203.3
NetU55_1: U55.1 U56.4 | length 56.2
  Bottom Layer w12: U56.4@1325.2,58.25 U55.1@1325.2,114.45
NetU56_1: U56.1 U57.4 | length 81.2
  Bottom Layer w12: U57.4@1210.89,24.61 1211.09,24.8 1291.76,24.8 U56.1@1291.96,25
NetU57_1: U57.1 U58.4 | length 75.2
  Bottom Layer w12: U57.1@1174.74,56.07 1177.6,58.93 U57.1@1177.6,60.15 ; U57.1@1177.74,59.07 1180.6,61.93 1180.6,63.15 1200.16,82.72 1201.39,82.72 1211.2,92.54 U58.4@1211.2,114.45
NetU58_1: U58.1 U59.4 | length 75.5
  Bottom Layer w12: U58.1@1174.74,144.92 1177.6,147.78 U58.1@1177.6,149 ; U58.1@1177.74,147.92 1180.6,150.78 1180.6,152 1199.97,171.37 1201.58,171.37 1211.2,181 U59.4@1211.2,203.3
NetU59_1: U59.1 U60.4 | length 75.2
  Bottom Layer w12: U59.1@1174.74,233.77 1177.6,236.62 U59.1@1177.6,237.85 ; U59.1@1177.74,236.77 1180.6,239.62 1180.6,240.85 1200.16,260.41 1201.39,260.41 1211.2,270.23 U60.4@1211.2,292.15
NetU60_1: U60.1 U61.4 | length 75.2
  Bottom Layer w12: U60.1@1174.74,322.61 1177.6,325.47 U60.1@1177.6,326.69 ; U60.1@1177.74,325.61 1180.6,328.47 1180.6,329.69 1200.16,349.26 1201.39,349.26 1211.2,359.08 U61.4@1211.2,381
NetU61_1: U61.1 U62.4 | length 75.2
  Bottom Layer w12: U61.1@1174.74,411.46 1177.6,414.32 U61.1@1177.6,415.54 ; U61.1@1177.74,414.46 1180.6,417.32 1180.6,418.54 1200.16,438.11 1201.39,438.11 1211.2,447.92 U62.4@1211.2,469.84
NetU62_1: U62.1 U63.4 | length 75.2
  Bottom Layer w12: U62.1@1174.74,500.31 1177.6,503.16 U62.1@1177.6,504.39 ; U62.1@1177.74,503.31 1180.6,506.16 1180.6,507.39 1200.16,526.95 1201.39,526.95 1211.2,536.77 U63.4@1211.2,558.69
NetU63_1: U63.1 U64.4 | length 75.2
  Bottom Layer w12: U63.1@1174.74,589.15 1177.6,592.01 U63.1@1177.6,593.23 ; U63.1@1177.74,592.15 1180.6,595.01 1180.6,596.23 1200.16,615.8 1201.39,615.8 1211.2,625.62 U64.4@1211.2,647.54
NetU64_1: U64.1 U65.4 | length 81.2
  Bottom Layer w12: U65.4@1096.36,680.39 1096.56,680.2 1177.23,680.2 U64.1@1177.43,680
NetU65_1: U65.1 U66.4 | length 53.6
  Bottom Layer w12: U66.4@1061.74,592.15 1062.35,592.15 1064.6,594.41 U65.1@1064.6,644.21
NetU66_1: U66.1 U67.4 | length 70
  Bottom Layer w12: U67.4@1061.74,503.31 1064.6,506.16 1064.6,507.39 1084.16,526.95 1085.39,526.95 1095.2,536.77 U66.1@1095.2,558.69
NetU67_1: U67.1 U68.4 | length 70
  Bottom Layer w12: U68.4@1061.74,414.46 1064.6,417.32 1064.6,418.54 1084.16,438.11 1085.39,438.11 1095.2,447.92 U67.1@1095.2,469.84
NetU68_1: U68.1 U69.4 | length 70
  Bottom Layer w12: U69.4@1061.74,325.61 1064.6,328.47 1064.6,329.69 1084.16,349.26 1085.39,349.26 1095.2,359.08 U68.1@1095.2,381
NetU69_1: U69.1 U70.4 | length 70
  Bottom Layer w12: U70.4@1061.74,236.77 1064.6,239.62 1064.6,240.85 1084.16,260.41 1085.39,260.41 1095.2,270.23 U69.1@1095.2,292.15
NetU70_1: U70.1 U71.4 | length 70.2
  Bottom Layer w12: U71.4@1061.74,147.92 1064.6,150.78 1064.6,152 1083.97,171.37 1085.58,171.37 1095.2,181 U70.1@1095.2,203.3
NetU71_1: U71.1 U72.4 | length 57.1
  Bottom Layer w12: U72.4@1095.2,57.31 U71.1@1095.2,114.45
NetU72_1: U72.1 U73.4 | length 81.2
  Bottom Layer w12: U73.4@981.84,24.61 982.03,24.8 1062.7,24.8 U72.1@1062.9,25
NetU73_1: U73.1 U74.4 | length 75.2
  Bottom Layer w12: U73.1@946.74,56.07 949.6,58.93 U73.1@949.6,60.15 ; U73.1@947.74,59.07 950.6,61.93 950.6,63.15 970.16,82.72 971.39,82.72 981.2,92.54 U74.4@981.2,114.45
NetU74_1: U74.1 U75.4 | length 70.2
  Bottom Layer w12: U74.1@947.74,147.92 949.37,147.92 960.98,159.53 960.98,160.75 978.98,178.75 978.98,201.08 U75.4@981.2,203.3
NetU75_1: U75.1 U76.4 | length 75.2
  Bottom Layer w12: U75.1@946.74,233.77 949.6,236.62 U75.1@949.6,237.85 ; U75.1@947.74,236.77 950.6,239.62 950.6,240.85 970.16,260.41 971.39,260.41 981.2,270.23 U76.4@981.2,292.15
NetU76_1: U76.1 U77.4 | length 75.2
  Bottom Layer w12: U76.1@946.74,322.61 949.6,325.47 U76.1@949.6,326.69 ; U76.1@947.74,325.61 950.6,328.47 950.6,329.69 970.16,349.26 971.39,349.26 981.2,359.08 U77.4@981.2,381
NetU77_1: U77.1 U78.4 | length 75.2
  Bottom Layer w12: U77.1@946.74,411.46 949.6,414.32 U77.1@949.6,415.54 ; U77.1@947.74,414.46 950.6,417.32 950.6,418.54 970.16,438.11 971.39,438.11 981.2,447.92 U78.4@981.2,469.84
NetU78_1: U78.1 U79.4 | length 75.2
  Bottom Layer w12: U78.1@946.74,500.31 949.6,503.16 U78.1@949.6,504.39 ; U78.1@947.74,503.31 950.6,506.16 950.6,507.39 970.16,526.95 971.39,526.95 981.2,536.77 U79.4@981.2,558.69
NetU79_1: U79.1 U80.4 | length 75.2
  Bottom Layer w12: U79.1@946.74,589.15 949.6,592.01 U79.1@949.6,593.23 ; U79.1@947.74,592.15 950.6,595.01 950.6,596.23 970.16,615.8 971.39,615.8 981.2,625.62 U80.4@981.2,647.54
NetU80_1: U80.1 U81.4 | length 81.2
  Bottom Layer w12: U81.4@867.31,680.39 867.5,680.2 948.18,680.2 U80.1@948.37,680
NetU81_1: U81.1 U82.4 | length 54.6
  Bottom Layer w12: U82.4@833.74,592.15 U81.1@833.74,646.73
NetU82_1: U82.1 U83.4 | length 70
  Bottom Layer w12: U83.4@833.74,503.31 836.6,506.16 836.6,507.39 856.16,526.95 857.39,526.95 867.2,536.77 U82.1@867.2,558.69
NetU83_1: U83.1 U84.4 | length 70
  Bottom Layer w12: U84.4@833.74,414.46 836.6,417.32 836.6,418.54 856.16,438.11 857.39,438.11 867.2,447.92 U83.1@867.2,469.84
NetU84_1: U84.1 U85.4 | length 70
  Bottom Layer w12: U85.4@833.74,325.61 836.6,328.47 836.6,329.69 856.16,349.26 857.39,349.26 867.2,359.08 U84.1@867.2,381
NetU85_1: U85.1 U86.4 | length 70
  Bottom Layer w12: U86.4@833.74,236.77 836.6,239.62 836.6,240.85 856.16,260.41 857.39,260.41 867.2,270.23 U85.1@867.2,292.15
NetU86_1: U86.1 U87.4 | length 70.2
  Bottom Layer w12: U87.4@833.74,147.92 836.6,150.78 836.6,152 855.97,171.37 857.58,171.37 867.2,181 U86.1@867.2,203.3
NetU87_1: U87.1 U88.4 | length 56.1
  Bottom Layer w12: U88.4@867.2,58.36 U87.1@867.2,114.45
NetU88_1: U88.1 U89.4 | length 81.2
  Bottom Layer w12: U89.4@752.78,24.61 752.98,24.8 833.64,24.8 U88.1@833.84,25
NetU89_1: U89.1 U90.4 | length 75.2
  Bottom Layer w12: U89.1@716.74,56.07 719.6,58.93 U89.1@719.6,60.15 ; U89.1@719.74,59.07 722.6,61.93 722.6,63.15 742.16,82.72 743.39,82.72 753.2,92.54 U90.4@753.2,114.45
NetU90_1: U90.1 U91.4 | length 75.5
  Bottom Layer w12: U90.1@716.74,144.92 719.6,147.78 U90.1@719.6,149 ; U90.1@719.74,147.92 722.6,150.78 722.6,152 741.97,171.37 743.58,171.37 753.2,181 U91.4@753.2,203.3
NetU91_1: U91.1 U92.4 | length 75.2
  Bottom Layer w12: U91.1@716.74,233.77 719.6,236.62 U91.1@719.6,237.85 ; U91.1@719.74,236.77 722.6,239.62 722.6,240.85 742.16,260.41 743.39,260.41 753.2,270.23 U92.4@753.2,292.15
NetU92_1: U92.1 U93.4 | length 75.2
  Bottom Layer w12: U92.1@716.74,322.61 719.6,325.47 U92.1@719.6,326.69 ; U92.1@719.74,325.61 722.6,328.47 722.6,329.69 742.16,349.26 743.39,349.26 753.2,359.08 U93.4@753.2,381
NetU93_1: U93.1 U94.4 | length 75.2
  Bottom Layer w12: U93.1@716.74,411.46 719.6,414.32 U93.1@719.6,415.54 ; U93.1@719.74,414.46 722.6,417.32 722.6,418.54 742.16,438.11 743.39,438.11 753.2,447.92 U94.4@753.2,469.84
NetU94_1: U94.1 U95.4 | length 75.2
  Bottom Layer w12: U94.1@716.74,500.31 719.6,503.16 U94.1@719.6,504.39 ; U94.1@719.74,503.31 722.6,506.16 722.6,507.39 742.16,526.95 743.39,526.95 753.2,536.77 U95.4@753.2,558.69
NetU95_1: U95.1 U96.4 | length 75.2
  Bottom Layer w12: U95.1@716.74,589.15 719.6,592.01 U95.1@719.6,593.23 ; U95.1@719.74,592.15 722.6,595.01 722.6,596.23 742.16,615.8 743.39,615.8 753.2,625.62 U96.4@753.2,647.54
NetU96_1: U96.1 U97.4 | length 81.2
  Bottom Layer w12: U97.4@638.25,680.39 638.45,680.2 719.12,680.2 U96.1@719.32,680
NetU97_1: U97.1 U98.4 | length 56.7
  Bottom Layer w12: U98.4@603.74,592.15 U97.1@603.74,648.83
NetU98_1: U98.1 U99.4 | length 70
  Bottom Layer w12: U99.4@603.74,503.31 606.6,506.16 606.6,507.39 626.16,526.95 627.39,526.95 637.2,536.77 U98.1@637.2,558.69
NetU99_1: U99.1 U100.4 | length 70
  Bottom Layer w12: U100.4@603.74,414.46 606.6,417.32 606.6,418.54 626.16,438.11 627.39,438.11 637.2,447.92 U99.1@637.2,469.84
NetU100_1: U100.1 U101.4 | length 70
  Bottom Layer w12: U101.4@603.74,325.61 606.6,328.47 606.6,329.69 626.16,349.26 627.39,349.26 637.2,359.08 U100.1@637.2,381
NetU101_1: U101.1 U102.4 | length 70
  Bottom Layer w12: U102.4@603.74,236.77 606.6,239.62 606.6,240.85 626.16,260.41 627.39,260.41 637.2,270.23 U101.1@637.2,292.15
NetU102_1: U102.1 U103.4 | length 70.2
  Bottom Layer w12: U103.4@603.74,147.92 606.6,150.78 606.6,152 625.97,171.37 627.58,171.37 637.2,181 U102.1@637.2,203.3
NetU103_1: U103.1 U104.4 | length 57
  Bottom Layer w12: U104.4@637.2,57.42 U103.1@637.2,114.45
NetU104_1: U104.1 U105.4 | length 81.2
  Bottom Layer w12: U105.4@523.72,24.61 523.92,24.8 604.59,24.8 U104.1@604.79,25
NetU105_1: U105.1 U106.4 | length 75.2
  Bottom Layer w12: U105.1@488.74,58.07 491.6,60.93 U105.1@491.6,62.15 ; U105.1@489.74,59.07 492.6,61.93 492.6,63.15 512.16,82.72 513.39,82.72 523.2,92.54 U106.4@523.2,114.45
NetU106_1: U106.1 U107.4 | length 75.5
  Bottom Layer w12: U106.1@488.74,146.92 491.6,149.78 U106.1@491.6,151 ; U106.1@489.74,147.92 492.6,150.78 492.6,152 511.97,171.37 513.58,171.37 523.2,181 U107.4@523.2,203.3
NetU107_1: U107.1 U108.4 | length 75.2
  Bottom Layer w12: U107.1@488.74,235.77 491.6,238.62 U107.1@491.6,239.85 ; U107.1@489.74,236.77 492.6,239.62 492.6,240.85 512.16,260.41 513.39,260.41 523.2,270.23 U108.4@523.2,292.15
NetU108_1: U108.1 U109.4 | length 70.1
  Bottom Layer w12: U108.1@489.74,325.61 491.26,325.61 502.86,337.22 502.86,338.44 515.33,350.91 515.33,351.2 523.2,359.08 U109.4@523.2,381
NetU109_1: U109.1 U110.4 | length 75.2
  Bottom Layer w12: U109.1@488.74,413.46 491.6,416.32 U109.1@491.6,417.54 ; U109.1@489.74,414.46 492.6,417.32 492.6,418.54 512.16,438.11 513.39,438.11 523.2,447.92 U110.4@523.2,469.84
NetU110_1: U110.1 U111.4 | length 75.2
  Bottom Layer w12: U110.1@488.74,502.31 491.6,505.16 U110.1@491.6,506.39 ; U110.1@489.74,503.31 492.6,506.16 492.6,507.39 512.16,526.95 513.39,526.95 523.2,536.77 U111.4@523.2,558.69
NetU111_1: U111.1 U112.4 | length 75.2
  Bottom Layer w12: U111.1@488.74,591.15 491.6,594.01 U111.1@491.6,595.23 ; U111.1@489.74,592.15 492.6,595.01 492.6,596.23 512.16,615.8 513.39,615.8 523.2,625.62 U112.4@523.2,647.54
NetU112_1: U112.1 U113.4 | length 81.2
  Bottom Layer w12: U113.4@409.19,680.39 409.39,680.2 490.06,680.2 U112.1@490.26,680
NetU113_1: U113.1 U114.4 | length 55.4
  Bottom Layer w12: U114.4@375.74,592.15 376.5,592.91 376.5,646.16 U113.1@375.73,646.93
NetU114_1: U114.1 U115.4 | length 70
  Bottom Layer w12: U115.4@375.74,503.31 378.6,506.16 378.6,507.39 398.16,526.95 399.39,526.95 409.2,536.77 U114.1@409.2,558.69
NetU115_1: U115.1 U116.4 | length 70
  Bottom Layer w12: U116.4@375.74,414.46 378.6,417.32 378.6,418.54 398.16,438.11 399.39,438.11 409.2,447.92 U115.1@409.2,469.84
NetU116_1: U116.1 U117.4 | length 70
  Bottom Layer w12: U117.4@375.74,325.61 378.6,328.47 378.6,329.69 398.16,349.26 399.39,349.26 409.2,359.08 U116.1@409.2,381
NetU117_1: U117.1 U118.4 | length 70
  Bottom Layer w12: U118.4@375.74,236.77 378.6,239.62 378.6,240.85 398.16,260.41 399.39,260.41 409.2,270.23 U117.1@409.2,292.15
NetU118_1: U118.1 U119.4 | length 70.2
  Bottom Layer w12: U119.4@375.74,147.92 378.6,150.78 378.6,152 397.97,171.37 399.58,171.37 409.2,181 U118.1@409.2,203.3
NetU119_1: U119.1 U120.4 | length 56
  Bottom Layer w12: U120.4@409.19,58.47 U119.1@409.2,114.45
NetU120_1: U120.1 U121.4 | length 81.2
  Bottom Layer w12: U121.4@294.66,24.61 294.86,24.8 375.53,24.8 U120.1@375.73,25
NetU121_1: U121.1 U122.4 | length 75.2
  Bottom Layer w12: U121.1@258.74,56.07 261.6,58.93 U121.1@261.6,60.15 ; U121.1@261.74,59.07 264.6,61.93 264.6,63.15 284.16,82.72 285.39,82.72 295.2,92.54 U122.4@295.2,114.45
NetU122_1: U122.1 U123.4 | length 75.5
  Bottom Layer w12: U122.1@258.74,144.92 261.6,147.78 U122.1@261.6,149 ; U122.1@261.74,147.92 264.6,150.78 264.6,152 283.97,171.37 285.58,171.37 295.2,181 U123.4@295.2,203.3
NetU123_1: U123.1 U124.4 | length 75.2
  Bottom Layer w12: U123.1@258.74,233.77 261.6,236.62 U123.1@261.6,237.85 ; U123.1@261.74,236.77 264.6,239.62 264.6,240.85 284.16,260.41 285.39,260.41 295.2,270.23 U124.4@295.2,292.15
NetU124_1: U124.1 U125.4 | length 74
  Bottom Layer w12: U124.1@258.74,322.61 261.6,325.47 U124.1@261.6,326.69 ; U124.1@261.74,325.61 264.6,328.47 264.6,329.69 284.16,349.26 285.39,349.26 294.66,358.54 U125.4@294.66,379.99
NetU125_1: U125.1 U126.4 | length 72.5
  Bottom Layer w7.87: U125.1@261.2,413.46 261.2,435.48 275.93,450.22 276.04,450.22 U126.4@294.66,468.84
  Bottom Layer w12: U125.1@258.74,411.46 U125.1@260.97,413.69
NetU126_1: U126.1 U127.4 | length 75.2
  Bottom Layer w12: U126.1@258.74,500.31 261.6,503.16 U126.1@261.6,504.39 ; U126.1@261.74,503.31 264.6,506.16 264.6,507.39 284.16,526.95 285.39,526.95 295.2,536.77 U127.4@295.2,558.69
NetU127_1: U127.1 U128.4 | length 75.2
  Bottom Layer w12: U127.1@258.74,589.15 261.6,592.01 U127.1@261.6,593.23 ; U127.1@261.74,592.15 264.6,595.01 264.6,596.23 284.16,615.8 285.39,615.8 295.2,625.62 U128.4@295.2,647.54
NetU128_1: U128.1 U129.4 | length 81.2
  Bottom Layer w12: U129.4@180.13,680.39 180.33,680.2 261,680.2 U128.1@261.2,680
NetU129_1: U129.1 U130.4 | length 57.1
  Bottom Layer w12: U130.4@145.74,592.15 U129.1@145.74,649.24
NetU130_1: U130.1 U131.4 | length 70
  Bottom Layer w12: U131.4@145.74,503.31 148.6,506.16 148.6,507.39 168.16,526.95 169.39,526.95 179.2,536.77 U130.1@179.2,558.69
NetU131_1: U131.1 U132.4 | length 59.6
  Bottom Layer w12: U132.4@177.28,410.99 179.2,412.92 U131.1@179.2,469.84
NetU132_1: U132.1 U133.4 | length 68
  Bottom Layer w12: U133.4@146.28,325.01 149.14,327.86 149.14,333.8 161.75,346.42 161.75,364.09 159.28,366.56 159.28,367.78 U132.1@146.67,380.39
NetU133_1: U133.1 U134.4 | length 70
  Bottom Layer w12: U134.4@145.74,236.77 148.6,239.62 148.6,240.85 168.16,260.41 169.39,260.41 179.2,270.23 U133.1@179.2,292.15
NetU134_1: U134.1 U135.4 | length 70.2
  Bottom Layer w12: U135.4@145.74,147.92 148.6,150.78 148.6,152 167.97,171.37 169.58,171.37 179.2,181 U134.1@179.2,203.3
NetU135_1: U135.1 U136.4 | length 56.9
  Bottom Layer w12: U136.4@179.2,57.54 U135.1@179.2,114.45